# EAGLE board backplane3 (EAGLE 6.6.0)
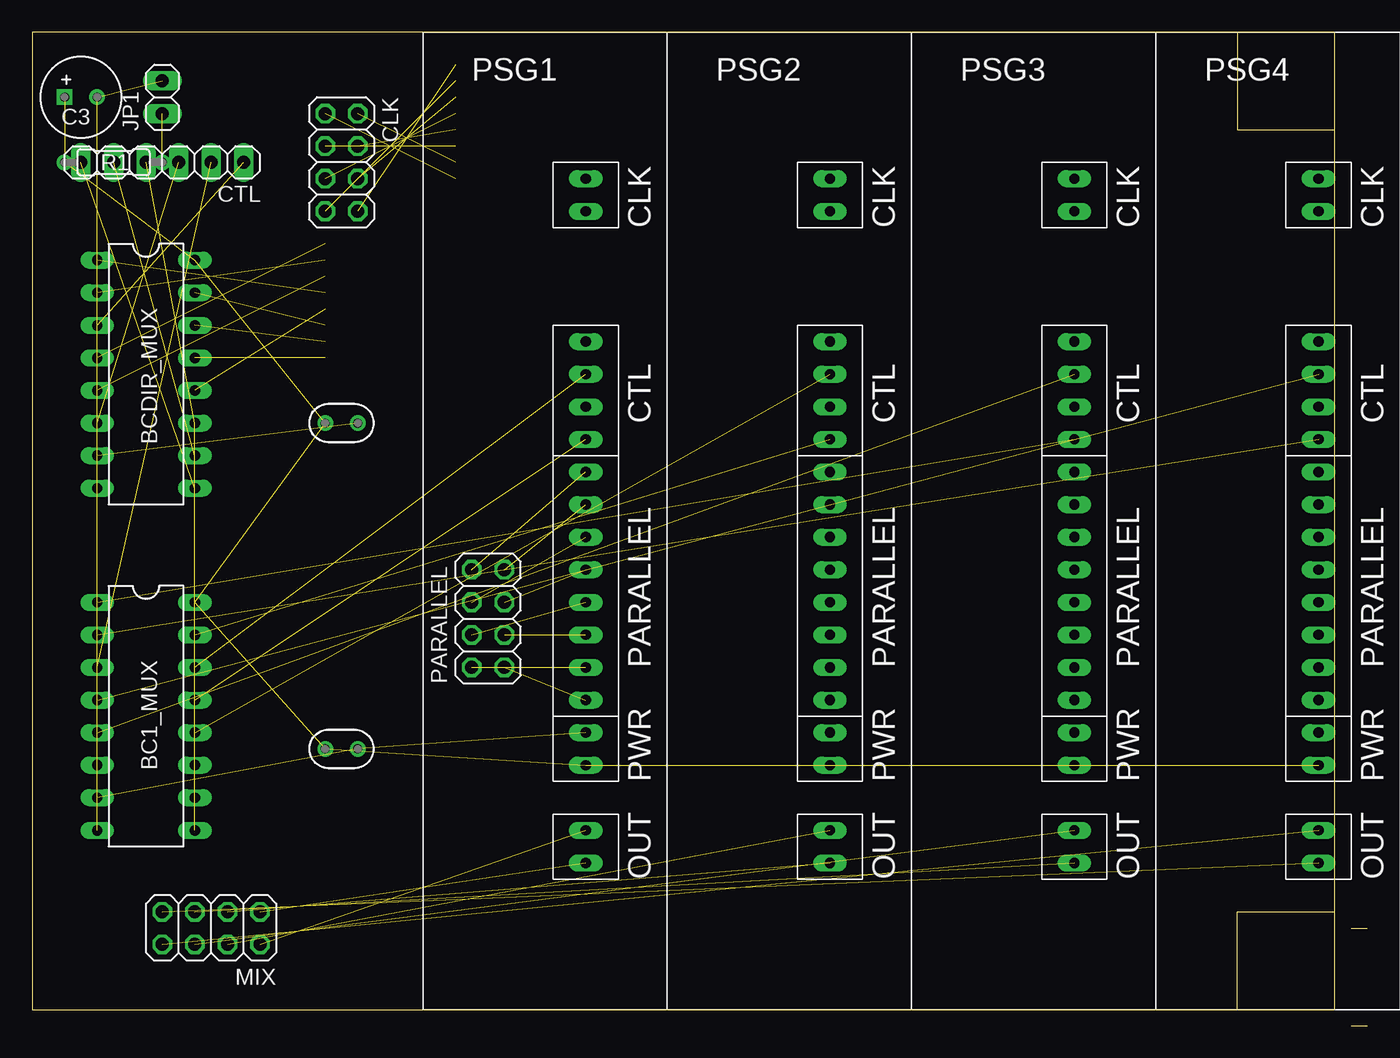
[diagram p0: board, top side]
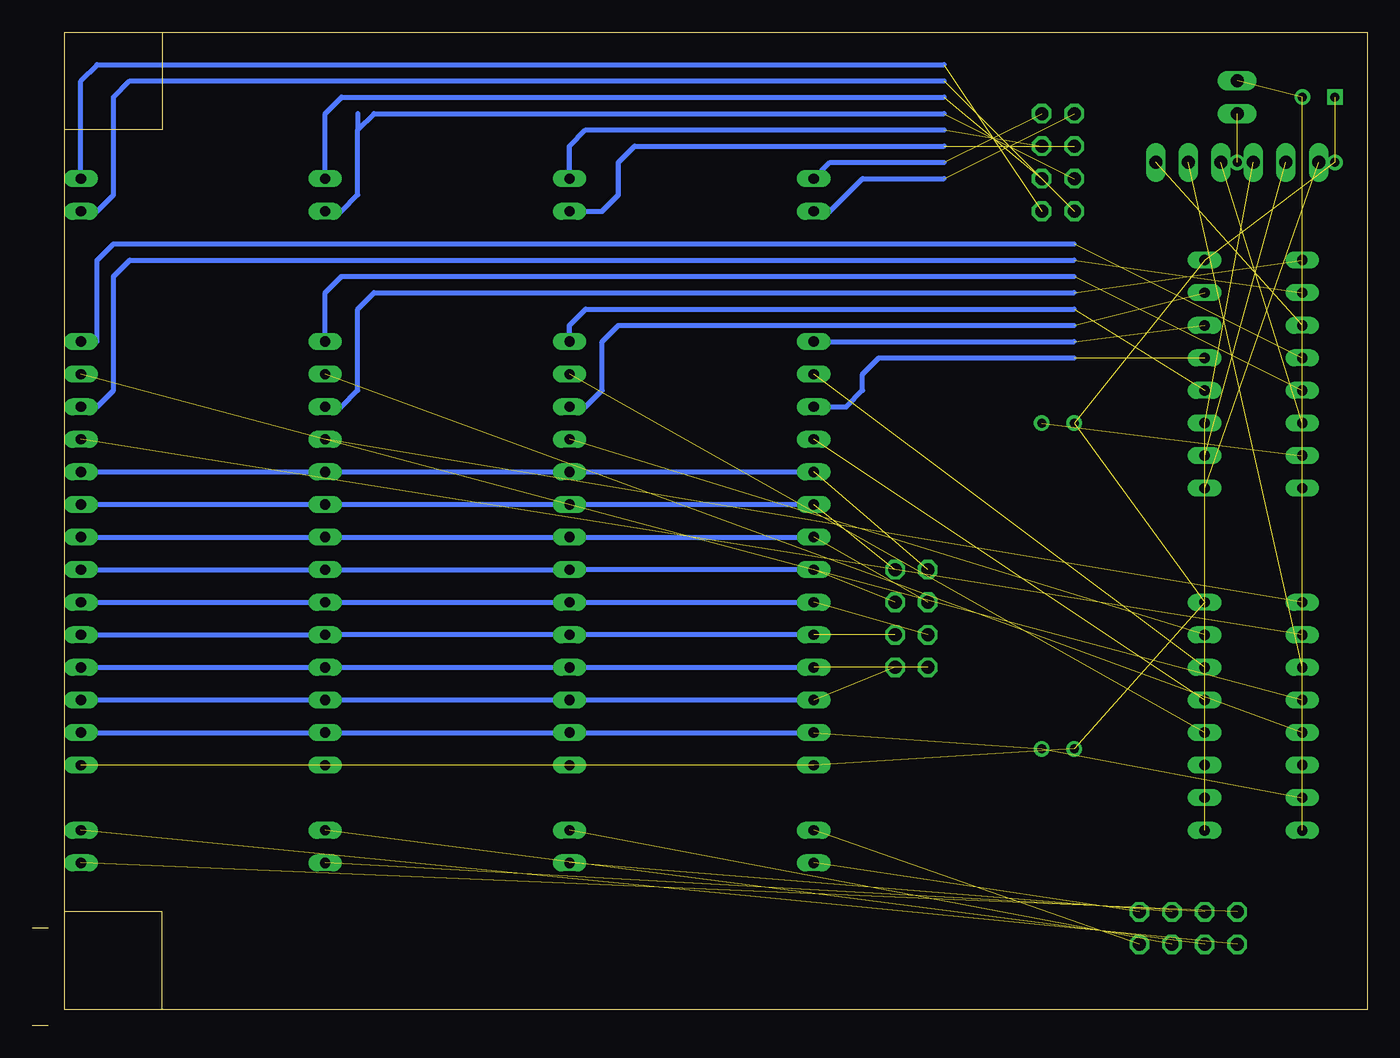
[diagram p1: board, bottom side, seen from below]

Size 104.14 x 77.47 mm. Coordinates in mm from the lower left corner, seen from the top.
Outline: 93.98,1.27 0,1.27 0,77.46 101.6,77.47 101.6,69.85
Outline: 93.98,1.27 101.6,1.27 101.6,8.89
Outline: 101.6,8.89 101.6,69.85
Outline: 93.98,1.27 93.98,8.89 101.6,8.89
Outline: 93.98,77.47 93.98,69.85 101.6,69.85
Outline: 102.87,0 104.14,0
Outline: 102.87,7.62 104.14,7.62
Copper layers (1*16): Top 0.035mm / dielectric 1.5mm / Bottom 0.035mm
Design rules "default": minimum track width 10mil, minimum drill 24mil, track to track 8mil, track to pad 8mil, pad to pad 8mil, via to via 8mil, smd to smd 8mil, copper to edge 40mil, drill to drill 8mil, minimum pad ring 10mil, minimum via ring 8mil, stop-mask expansion 4mil, vias tented up to drill 0mil, thermal gap 10mil

## Footprints (pad centres in the part's own frame; a part is rotated, then mirrored left to right if it is on the bottom)
DIL16 = drill 0.813 long: 1 -8.89,-3.81; 2 -6.35,-3.81; 3 -3.81,-3.81; 4 -1.27,-3.81; 5 1.27,-3.81; 6 3.81,-3.81; 7 6.35,-3.81; 8 8.89,-3.81; 9 8.89,3.81; 10 6.35,3.81; 11 3.81,3.81; 12 1.27,3.81; 13 -1.27,3.81; 14 -3.81,3.81; 15 -6.35,3.81; 16 -8.89,3.81
050X030_025 = drill 0.7: 1 -1.27,0; 2 1.27,0
063_025 = drill 0.7 square: + -1.27,0 | drill 0.7: - 1.27,0
2X04 = drill 1.016 octagon: 1 -3.81,-1.27; 2 -3.81,1.27; 3 -1.27,-1.27; 4 -1.27,1.27; 5 1.27,-1.27; 6 1.27,1.27; 7 3.81,-1.27; 8 3.81,1.27
1X06 = drill 1.016 long: 1 -6.35,0; 2 -3.81,0; 3 -1.27,0; 4 1.27,0; 5 3.81,0; 6 6.35,0
1X02 = drill 1.016 long: 1 -1.27,0; 2 1.27,0
DUAL_PSG_DAUGHTER = drill 0.8 long: BC1_0 0,44.45; BC1_1 0,49.53; BCDIR_0 0,46.99; BCDIR_1 0,52.07; CLK_0 0,62.23; CLK_1 0,64.77; DA0 0,24.13; DA1 0,26.67; DA2 0,29.21; DA3 0,31.75; DA4 0,34.29; DA5 0,36.83; DA6 0,39.37; DA7 0,41.91; GND 0,21.59; MIX_0 0,11.43; MIX_1 0,13.97; VCC 0,19.05
R0207/3 = drill 0.7: 1 -3.81,0; 2 3.81,0

## Placement (x,y rotation side)
BC1_MUX  4051N  [DIL16]  8.89,24.13 270 top
BCDIR_MUX  4051N  [DIL16]  8.89,50.8 270 top
C1  [050X030_025]  24.13,46.99 0 top
C2  [050X030_025]  24.13,21.59 0 top
C3  [063_025]  3.81,72.39 0 top
CLK  [2X04]  24.13,67.31 270 top
CTL  [1X06]  10.16,67.31 180 top
JP1  [1X02]  10.16,72.39 90 top
JP4  [2X04]  -85.09,-20.32 0 top  (outside the outline)
MIX  [2X04]  13.97,7.62 180 top
PARALLEL  [2X04]  35.56,31.75 90 top
PSG1  DUAL_PSG_DAUGHTER  [DUAL_PSG_DAUGHTER]  43.18,1.27 0 top
PSG2  DUAL_PSG_DAUGHTER  [DUAL_PSG_DAUGHTER]  62.23,1.27 0 top
PSG3  DUAL_PSG_DAUGHTER  [DUAL_PSG_DAUGHTER]  81.28,1.27 0 top
PSG4  DUAL_PSG_DAUGHTER  [DUAL_PSG_DAUGHTER]  100.33,1.27 0 top
R1  [R0207/3]  6.35,67.31 180 top

## Library data of the parts
BC1_MUX BCDIR_MUX = 40xx
C1 C2 = gm-caps-ceramic
C3 = gm-caps-electro-pol
CLK CTL JP1 JP4 MIX PARALLEL = pinhead
PSG1-PSG4 = jaapie
R1 = gm-resistors

## Nets
3: BCDIR_MUX.12 PSG2.BCDIR_1
A: BC1_MUX.11 BCDIR_MUX.11 CTL.4
B: BC1_MUX.10 BCDIR_MUX.10 CTL.5
BC1: BC1_MUX.3 CTL.2
BC1_0: BC1_MUX.13 PSG1.BC1_0
BC1_1: BC1_MUX.14 PSG1.BC1_1
BC1_2: BC1_MUX.15 PSG2.BC1_0
BC1_3: BC1_MUX.12 PSG2.BC1_1
BC1_4: BC1_MUX.1 PSG3.BC1_0
BC1_5: BC1_MUX.5 PSG3.BC1_1
BC1_6: BC1_MUX.2 PSG4.BC1_0
BC1_7: BC1_MUX.4 PSG4.BC1_1
BC_INH: BC1_MUX.6 BCDIR_MUX.6 CTL.3
BCDIR: BCDIR_MUX.3 CTL.1
BCDIR_0: BCDIR_MUX.13 PSG1.BCDIR_0
BCDIR_1: BCDIR_MUX.14 PSG1.BCDIR_1
BCDIR_2: BCDIR_MUX.15 PSG2.BCDIR_0
BCDIR_4: BCDIR_MUX.1 PSG3.BCDIR_0
BCDIR_5: BCDIR_MUX.5 PSG3.BCDIR_1
BCDIR_6: BCDIR_MUX.2 PSG4.BCDIR_0
BCDIR_7: BCDIR_MUX.4 PSG4.BCDIR_1
C: BC1_MUX.9 BCDIR_MUX.9 CTL.6
CLK_0: CLK.1 PSG1.CLK_0
CLK_1: CLK.2 PSG1.CLK_1
CLK_2: CLK.3 PSG2.CLK_0
CLK_3: CLK.4 PSG2.CLK_1
CLK_4: CLK.5 PSG3.CLK_0
CLK_5: CLK.6 PSG3.CLK_1
CLK_6: CLK.7 PSG4.CLK_0
CLK_7: CLK.8 PSG4.CLK_1
DA0: PARALLEL.1 PSG1.DA0 PSG2.DA0 PSG3.DA0 PSG4.DA0
DA1: PARALLEL.2 PSG1.DA1 PSG2.DA1 PSG3.DA1 PSG4.DA1
DA2: PARALLEL.3 PSG1.DA2 PSG2.DA2 PSG3.DA2 PSG4.DA2
DA3: PARALLEL.4 PSG1.DA3 PSG2.DA3 PSG3.DA3 PSG4.DA3
DA4: PARALLEL.5 PSG1.DA4 PSG2.DA4 PSG3.DA4 PSG4.DA4
DA5: PARALLEL.6 PSG1.DA5 PSG2.DA5 PSG3.DA5 PSG4.DA5
DA6: PARALLEL.7 PSG1.DA6 PSG2.DA6 PSG3.DA6 PSG4.DA6
DA7: PARALLEL.8 PSG1.DA7 PSG2.DA7 PSG3.DA7 PSG4.DA7
GND: BC1_MUX.7 BC1_MUX.8 BCDIR_MUX.7 BCDIR_MUX.8 C1.2 C2.2 C3.- JP1.2 PSG1.GND PSG2.GND PSG3.GND PSG4.GND
MIX_0: MIX.1 PSG1.MIX_0
MIX_1: MIX.2 PSG1.MIX_1
MIX_2: MIX.3 PSG2.MIX_0
MIX_3: MIX.4 PSG2.MIX_1
MIX_4: MIX.5 PSG3.MIX_0
MIX_5: MIX.6 PSG3.MIX_1
MIX_6: MIX.7 PSG4.MIX_0
MIX_7: MIX.8 PSG4.MIX_1
N$1: BC1_MUX.16 BCDIR_MUX.16 C1.1 C2.1 C3.+ PSG1.VCC PSG2.VCC PSG3.VCC PSG4.VCC R1.2
V+: JP1.1 R1.1

## Tracks (layer width: path | path; a pad name or v marks a point on that pad's centre or on a via)
3  (1 unrouted)
  Bottom 0.406: PSG2.BCDIR_1 62.23,54.61 60.96,55.88 22.86,55.88
A  (2 unrouted)
B  (2 unrouted)
BC1  (1 unrouted)
BC1_0  (1 unrouted)
BC1_1  (1 unrouted)
BC1_2  (1 unrouted)
BC1_3  (1 unrouted)
BC1_4  (1 unrouted)
BC1_5  (1 unrouted)
BC1_6  (1 unrouted)
BC1_7  (1 unrouted)
BC_INH  (2 unrouted)
BCDIR  (1 unrouted)
BCDIR_0  (1 unrouted)
  Bottom 0.406: PSG1.BCDIR_0 40.64,48.26 39.37,49.53 39.37,50.8 38.1,52.07 22.86,52.07
BCDIR_1  (1 unrouted)
  Bottom 0.406: PSG1.BCDIR_1 22.86,53.34
BCDIR_2  (1 unrouted)
  Bottom 0.406: PSG2.BCDIR_0 60.96,48.26 59.69,49.53 59.69,53.34 58.42,54.61 22.86,54.61
BCDIR_4  (1 unrouted)
  Bottom 0.406: PSG3.BCDIR_0 80.01,48.26 78.74,49.53 78.74,55.88 77.47,57.15 22.86,57.15
BCDIR_5  (1 unrouted)
  Bottom 0.406: PSG3.BCDIR_1 81.28,57.15 80.01,58.42 22.86,58.42
BCDIR_6  (1 unrouted)
  Bottom 0.406: PSG4.BCDIR_0 99.06,48.26 97.79,49.53 97.79,58.42 96.52,59.69 22.86,59.69
BCDIR_7  (1 unrouted)
  Bottom 0.406: PSG4.BCDIR_1 99.06,53.34 99.06,59.69 97.79,60.96 22.86,60.96
C  (2 unrouted)
CLK_0  (1 unrouted)
  Bottom 0.406: PSG1.CLK_0 41.91,63.5 39.37,66.04 33.02,66.04
CLK_1  (1 unrouted)
  Bottom 0.406: PSG1.CLK_1 41.91,67.31 33.02,67.31
CLK_2  (1 unrouted)
  Bottom 0.406: PSG2.CLK_0 59.69,63.5 58.42,64.77 58.42,67.31 57.15,68.58 33.02,68.58
CLK_3  (1 unrouted)
  Bottom 0.406: PSG2.CLK_1 62.23,68.58 60.96,69.85 33.02,69.85
CLK_4  (1 unrouted)
  Bottom 0.406: PSG3.CLK_0 80.01,63.5 78.74,64.77 78.74,69.85 | 78.74,71.12 78.74,69.85 | 78.74,69.85 77.47,71.12 33.02,71.12
CLK_5  (1 unrouted)
  Bottom 0.406: PSG3.CLK_1 81.28,71.12 80.01,72.39 33.02,72.39
CLK_6  (1 unrouted)
  Bottom 0.406: PSG4.CLK_0 99.06,63.5 97.79,64.77 97.79,72.39 96.52,73.66 33.02,73.66
CLK_7  (1 unrouted)
  Bottom 0.406: PSG4.CLK_1 100.33,73.66 99.06,74.93 33.02,74.93
DA0  (1 unrouted)
  Bottom 0.406: PSG1.DA0 PSG2.DA0 PSG3.DA0 PSG4.DA0
DA1  (1 unrouted)
  Bottom 0.406: PSG4.DA1 PSG3.DA1 PSG2.DA1 PSG1.DA1
DA2  (1 unrouted)
  Bottom 0.406: PSG4.DA2 PSG3.DA2 PSG2.DA2 PSG1.DA2
DA3  (1 unrouted)
  Bottom 0.406: PSG4.DA3 PSG3.DA3 PSG2.DA3 PSG1.DA3
DA4  (1 unrouted)
  Bottom 0.406: PSG1.DA4 PSG2.DA4 PSG3.DA4 PSG4.DA4
DA5  (1 unrouted)
  Bottom 0.406: PSG4.DA5 PSG3.DA5 PSG2.DA5 PSG1.DA5
DA6  (1 unrouted)
  Bottom 0.406: PSG1.DA6 PSG2.DA6 PSG3.DA6 PSG4.DA6
DA7  (1 unrouted)
  Bottom 0.406: PSG4.DA7 PSG3.DA7 PSG2.DA7 PSG1.DA7
GND  (8 unrouted)
  Bottom 0.406: PSG4.GND PSG3.GND PSG2.GND PSG1.GND
MIX_0  (1 unrouted)
MIX_1  (1 unrouted)
MIX_2  (1 unrouted)
MIX_3  (1 unrouted)
MIX_4  (1 unrouted)
MIX_5  (1 unrouted)
MIX_6  (1 unrouted)
MIX_7  (1 unrouted)
N$1  (9 unrouted)
V+  (1 unrouted)